# Altium PCB Incubator_HUZZAH32.PcbDoc
Units mil, origin at the board's own origin, x right, y up, seen from the top; angles counter-clockwise.
Board outline 5511.81 x 1106.3 mil, 2 copper layers (Top Layer, Bottom Layer); 32 components, 26 nets, 138 pads, 175 vias.
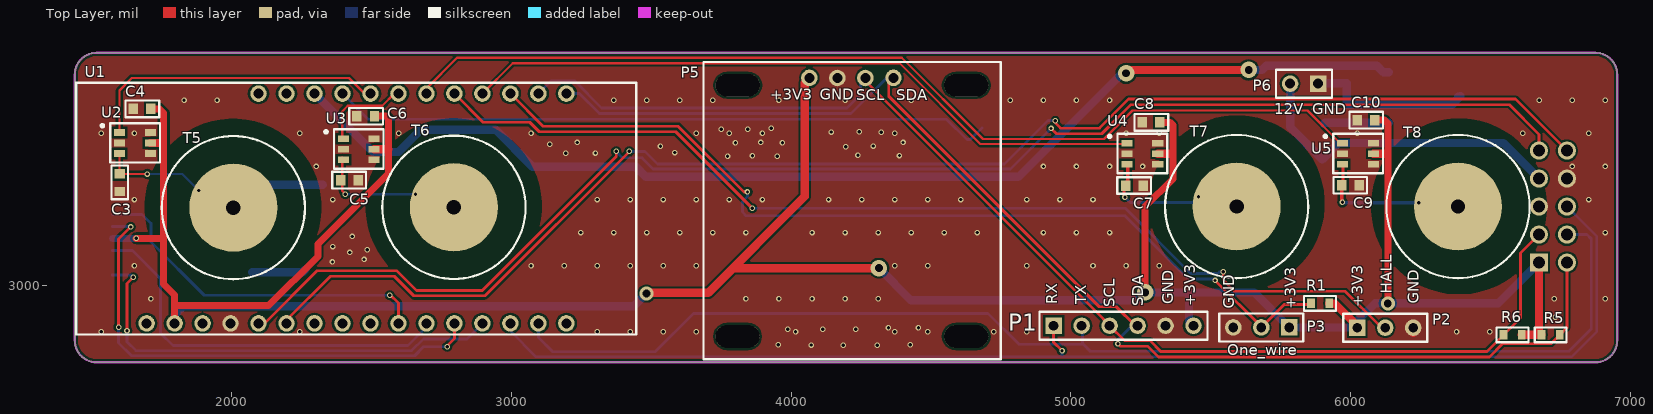
[diagram p0: Top Layer view]
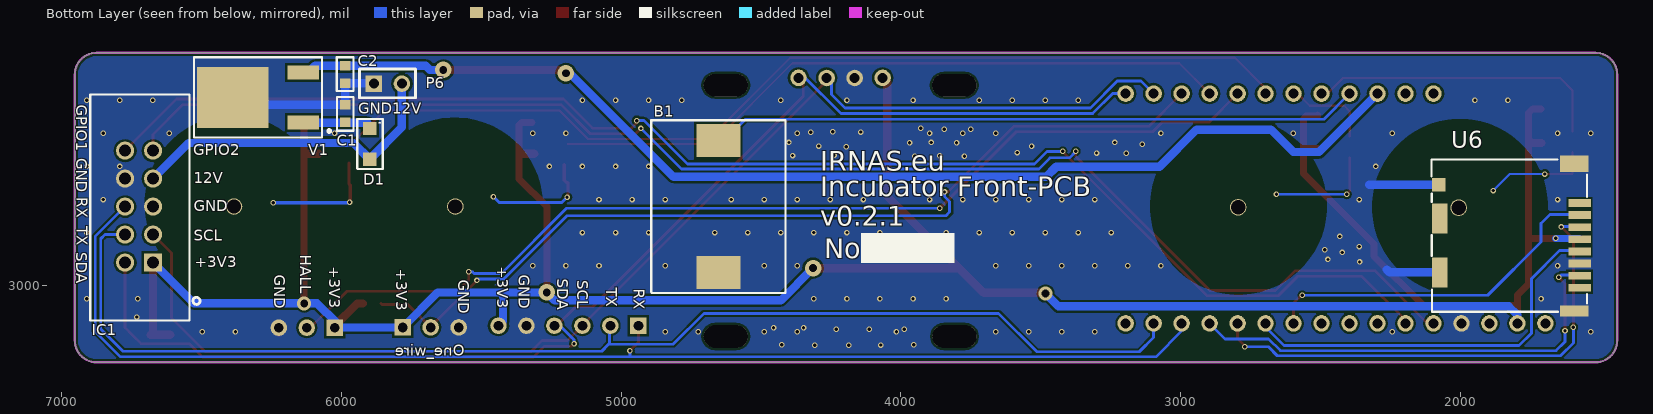
[diagram p1: Bottom Layer view, seen from below]

## Layer stack, top to bottom
Top Solder: solder mask 0.4, Solder Resist, Dk 3.5
Top Layer: signal copper 1.4
Dielectric 1: dielectric 12.6, FR-4, Dk 4.8
Bottom Layer: signal copper 1.4
Bottom Solder: solder mask 0.4, Solder Resist, Dk 3.5

## Board outline
1518.99,2725.25 cw(c1518.99,2803.99) 1440.25,2803.99 1440.25,3752.81 cw(c1518.99,3752.81) 1518.99,3831.55 6873.32,3831.55 cw(c6873.32,3752.81) 6952.06,3752.81 6952.06,2803.99 cw(c6873.32,2803.99) 6873.32,2725.25

## Design rules (kind name [scope] priority, off if disabled: settings)
Clearance [All] p1: gap=8 ignorepadtopadclearanceinfootprint=FALSE except(0: Arc-Hole Track-Hole SMDPad-Hole THPad-Hole Via-Hole Fill-Hole Poly-Hole Region-Hole Text-Hole)
HoleSize [All] p1: absolutevalues=TRUE maxlimit=196.85 minlimit=1 maxpercent=80.000 minpercent=20.000
MinimumAnnularRing [All] p1: minimumring=1.97
MinimumSolderMaskSliver [All] p1: minsoldermaskwidth=0.04
PlaneClearance [InNet('NetR1_1')] p1: clearance=30
PlaneConnect [All] p1: planeconnectstyle=Direct reliefexpansion=20 reliefentries=4 reliefconductorwidth=10 reliefairgap=10
PolygonConnect [All] p1: connectstyle=Direct reliefconductorwidth=10 reliefentries=4 polygonreliefangle="90 Angle" airgapwidth=10
RoutingVias [All] p1: holewidth=11.81 width=19.68 viastyle="Through Hole" minholewidth=11.81 minwidth=19.68 maxholewidth=11.81 maxwidth=19.68
SilkToSilkClearance [All] p1: silktosilkclearance=3.94
SilkToSolderMaskClearance [IsPad] p1: minsilkscreentomaskgap=3.94 clearancetoexposedcopper=TRUE
SolderMaskExpansion [All] p1: expansion=4
Width Width_2 [All] p1: maxlimit=30 minlimit=7 preferedwidth=10
Width Width_1 [InNet('+3V3')] p2: maxlimit=30 minlimit=10 preferedwidth=30
Width [InNetClass('Buttons')] p3: maxlimit=30 minlimit=7 preferedwidth=10
24 further rules are at their usual default settings.

## Components (designator, comment, footprint, x,y, rotation, side; value= is the part's Value field where it differs from the comment)
B1 "Buzzer" BUZZER 4412,3526 r270 bottom
C1 "0.33uF" CAP0603 5985,3614 r270 bottom
C2 "0.1uF" CAP0603 5986,3754 r90 bottom
C3 "10pF cap" CAP0603 1601,3367 r90 top
C4 "150nF cap" CAP0603 1681,3631 r0 top
C5 "10pF cap" CAP0603 2422,3376 r180 top
C6 "150nF cap" CAP0603 2480,3605 r0 top
C7 "10pF cap" CAP0603 5227,3357 r180 top
C8 "150nF cap" CAP0603 5286,3583 r0 top
C9 "10pF cap" CAP0603 5999,3358 r180 top
C10 "150nF cap" CAP0603 6054,3591 r0 top
D1 "Diode" SODFL350X110-2N 5898,3506 r270 bottom
IC1 "IDC10" IDC10 6726,3291 r90 bottom
P1 "Header 6" HDR1X6 4938,2856 r0 top
P2 "HALL" HDR1X3 6023,2849 r0 top
P3 "One_wire" HDR1X3 5780,2850 r180 top
P5 "LCD_display" LCD_DISPLAY 3687,3798 r0 top
P6 "Power" HDR1X2 5883,3721 r180 top
R1 "4K7" RES0603 5832.89,2909.42 r0 top
R5 "4K7" RES0603 6657,2797 r0 top
R6 "4K7" RES0603 6635,2850 r180 top
T5 "Touch button" Touch_Button 2007,3278 r0 top
T6 "Touch button" Touch_Button 2795.1,3279.32 r0 top
T7 "Touch button" Touch_Button 5592,3282 r0 top
T8 "Touch button" Touch_Button 6383,3282 r0 top
U1 "ESP32" ESP32 1447,2825 r90 top
U2 "Touch sensor" TTP223 1656,3509 r0 top
U3 "Touch sensor" TTP223 2455,3487 r0 top
U4 "Touch sensor" TTP223 5255,3471 r0 top
U5 "Touch sensor" TTP223 6026,3471 r0 top
U6 "micro_SD" MICRO_SD 1767,3593 r90 bottom
V1 "Voltage regulator" DPAK248P950X240-3N 6387,3672 r0 bottom

## Footprints (in the part's own frame and the unit in brackets; to place one, negate y for a bottom-side part, rotate by r counter-clockwise, add the part's x,y. Pads: shape width x height; smd on the part's side, far side on the other; paste and mask are expansions set on the pad)
BUZZER [mm]
  rect 3x4 smd: 1(0.2,-6.1) 2(12.2,-6.1)
  silkscreen extent -1.64,-12.19 14.05,-0.01, body extent -0.33,-12.22 12.73,-0.05, height 3
CAP0603 [mm] "Chip Capacitor, 2-Leads, Body 1.60x0.80mm, IPC Medium Density"
  rect 0.85x0.95 smd: 1(-0.8,0) 2(0.8,0)
  silkscreen extent -1.5,-0.76 1.56,0.75, body extent -0.8,-0.4 0.8,0.4, height 0.6
DPAK248P950X240-3N [mm] "D-PAK, 3-Pads, Body 6.25x6.76mm (max), IPC Medium Density"
  rect 2.85x1.25 smd: 1(-6.39,2.29) 3(-6.39,-2.27)
  rect 6.5x5.55 smd: 2(0,0)
  silkscreen extent -8.88,-3.65 3.54,3.64, body extent -4.4,-3.4 1.9,3.4, height 2.4
ESP32 [mm]
  round 1.5 hole 0.9: 1(1,-6.35) 2(1,-8.89) 3(1,-11.43) 4(1,-13.97) 5(1,-16.51) 6(1,-19.05) 7(1.01,-21.59) 8(1,-24.13) 9(1,-26.67) 10(1,-29.21) 11(1,-31.75) 12(1,-34.29) 13(1,-36.83) 14(1,-39.37) 15(1,-41.91) 16(1,-44.45) 17(21.86,-44.45) 18(21.86,-41.91) 19(21.86,-39.37) 20(21.86,-36.83) 21(21.86,-34.29) 22(21.86,-31.75) 23(21.86,-29.21) 24(21.86,-26.67) 25(21.86,-24.13) 26(21.86,-21.59) 27(21.86,-19.05) 28(21.86,-16.51)
  silkscreen extent 0,-50.8 22.85,0.04
HDR1X2 [mm] "Connector; Header; 2 Position"
  rect 1.5x1.5 hole 0.9: 1(0,0)
  round 1.5 hole 0.9: 2(2.54,0)
  silkscreen extent -1.27,-1.27 3.81,1.27
HDR1X3 [mm] "Connector; Header; 3 Position"
  rect 1.5x1.5 hole 0.9: 1(0,0)
  round 1.5 hole 0.9: 2(2.54,0) 3(5.08,0)
  silkscreen extent -1.27,-1.27 6.35,1.27
HDR1X6 [mm] "Connector; Header; 6 Position"
  rect 1.5x1.5 hole 0.9: 1(0,0)
  round 1.5 hole 0.9: 2(2.54,0) 3(5.08,0) 4(7.62,0) 5(10.16,0) 6(12.7,0)
  silkscreen extent -1.27,-1.27 13.97,1.27
IDC10 [mm]
  rect 1.65x1.65 / inner round 1.65 / far side rect 1.65x1.65 hole 1.1: 1(-5.313,-1.367)
  round 1.65 hole 1.1: 2(-5.313,1.173) 3(-2.773,-1.367) 4(-2.773,1.173) 5(-0.233,-1.367) 6(-0.233,1.173) 7(2.307,-1.367) 8(2.307,1.173) 9(4.847,-1.367) 10(4.847,1.173)
  silkscreen extent -10.56,-5.63 9.95,4.33, body extent -10.45,-4.51 9.91,4.66, height 9.43
LCD_DISPLAY [mm]
  round 1.5 hole 0.9: 1(9.61,-1.43)
  round 1.501 hole 0.9: 2(12.15,-1.44) 3(14.69,-1.44) 4(17.24,-1.43)
  oval 4x2 hole 2.032 slot 3.988 at 0 deg unplated: ""(3.09,-24.9) ""(3.1,-2.1) ""(23.85,-24.9) ""(23.85,-2.1)
  silkscreen extent 0.01,-26.96 26.97,0, body extent 0.14,-26.95 26.84,0.91, height 5.47
MICRO_SD [mm]
  rect 0.7x2 smd: 1(-7.577,-4.893) 2(-8.677,-4.893) 3(-9.777,-4.893) 4(-10.877,-4.893) 5(-11.977,-4.893) 6(-13.077,-4.893) 7(-14.177,-4.893) 8(-15.277,-4.893)
  rect 1x2.6 smd: 9(-17.377,-4.393)
  rect 1.5x2.6 smd: 10(-4.027,-4.393)
  rect 1.2x1.2 smd: 11(-5.927,7.907)
  rect 2.7x1.4 smd: 12(-8.977,7.807) 13(-13.877,7.807)
  silkscreen extent -17.45,-5.54 -3.62,8.55, body extent -17.45,-6.93 -3.65,8.45, height 1.98
RES0603 [mm] "Chip Resistor, 2-Leads, Body 1.60x0.80mm, IPC Medium Density"
  rect 0.7x0.85 smd: 1(0.625,0.675) 2(2.275,0.675)
  silkscreen extent 0,0 2.9,1.35, body extent 0.65,0.28 2.25,1.07, height 0.6
SODFL350X110-2N [mm] "SODFL, 2-Leads, Body 1.90x3.50mm, IPC Medium Density"
  rect 1.2x1.2 smd: 1(-1.4,0) 2(1.4,0)
  silkscreen extent -2.26,-1.14 2.27,1.19, body extent -1.4,-0.95 1.4,0.95, height 1.1
Touch_Button [mm]
  round 8 smd: 1(0,0)
  round 1.5 hole 1.3: 1(0,0)
  silkscreen extent -6.5,-6.5 6.5,6.5
TTP223 [mm] "TSOP, 6-Leads, Body 2.90x1.70mm, Pitch 0.95mm, IPC Medium Density"
  rect 1x0.6 smd: 1(-1.4,0.95) 2(-1.4,0) 3(-1.4,-0.95) 4(1.4,-0.95) 5(1.4,0) 6(1.4,0.95)
  silkscreen extent -3.09,-1.78 2.26,1.8, body extent -0.9,-1.55 0.9,1.55, height 1.26

## Part data
B1: "MULTICOMP         MCABT-458-RC            SOUNDER, 75DB, 1-25V, SMD", Current Rating=1mA, Manufacturer=Multicomp, Manufacturer Part Number=MCABT-458-RC, Resonant Frequency=4kHz, Supply Voltage Max=25V, Supply Voltage Min=1V, ComponentLink1Description=http://www.farnell.com/datasheets/1860703.pdf, ComponentLink1URL=http://www.farnell.com/datasheets/1860703.pdf, Pricing 1="1=1.84, 3=1.67, 5=1.53, 10=1.44, 20=1.18, 50=1.16, 250=1.13 (EUR)", Product Range=-, Sound Level SPL=75dB, Stock 1=2929, Supplier 1=Farnell, SVHC="No SVHC (15-Jun-2015)", Tones=Single, Transducer Function=Sounder, Transducer Mounting=SMD
C1: "0.33µF ±10% 50V X7R Ceramic Capacitor -55°C ~ 125°C Surface Mount, MLCC 0603 (1608 Metric) 0.063\" L x 0.031\" W (1.60mm x 0.80mm)", Capacitance=0.33µF, Manufacturer=TDK, Manufacturer Part Number=C1608X7R1H334K080AC, Operating Temperature="-55°C ~ 125°C", Package / Case="0603 (1608 Metric)", PCN Part Number="MLCC Part Number Change 30/Nov/2012", Standard Package=1, Supplier Part Number 1=2346907, Temperature Coefficient=X7R, Tolerance=±10%, Voltage - Rated=50V, Applications="General Purpose", Catalog Drawings="C SERIES_0603_0.95", Category=Capacitors, Design Resources="20 W Non-Isolated Buck LED Driver Using PL LNK460KG", EDA / CAD Models="Download from Accelerated Designs", Family="Ceramic Capacitors", Mounting Type="Surface Mount, MLCC", Online Catalog="C Series, General Purpose", Other Names=445-5950-6, Packaging=Digi-Reel®, Pricing 1="10=0.405, 100=0.221, 500=0.152, 1000=0.116 (EUR)", Product Training Modules="C Series General Applications SEAT, CCV, and TVCL Design Tools Guide to Replacing an Electrolytic Capacitor with an MLCC", RoHS Information="RoHS Certificate-MLCC", Series=C, Size / Dimension="0.063\" L x 0.031\" W (1.60mm x 0.80mm)", Stock 1=46003, Supplier 1=Farnell, Thickness (Max)="0.037\" (0.95mm)"
C2: "CAP CER 0.1UF 50V X7R 0603", Capacitance=.1uF, Case Style="Ceramic Chip", Manufacturer=KEMET, Manufacturer Part Number=C0603C104J5RACAUTO, Operating Temp Range="-55C to 125C", Package / Case=0603, Supplier Part Number 1=2478241, Temp Coeff (Dielectric)=X7R, Tolerance (+ or -)=5%, Voltage=50VDC, Construction="SMT Chip", Failure Rate="Not Required", Mounting Style="Surface Mount", Packaging="Tape and Reel", Product Depth (mm)=0.8mm, Product Diameter (mm)="Not Requiredmm", Product Height (mm)=0.8mm, Product Length (mm)=1.6mm, Stock 1=0, Supplier 1=Farnell, Wire Form="Not Required"
C3 C5 C7 C9: library part 10pF, "Cap Ceramic 10pF 50V X7R 10% SMD 0603 125C T/R", Capacitance="10 pF", Case Size/Dimension=0603, Dielectric=X7R, Manufacturer="Kyocera AVX", Manufacturer Part Number=06035C100KAT2A, Rated Voltage="50 V", Supplier Part Number 1=2332633, Tolerance (%)="±10 %", Stock 1=0, Supplier 1=Farnell
C4 C6 C8 C10: library part 150nF, Capacitance=.15uF, Case Style="Ceramic Chip", Manufacturer=KEMET, Manufacturer Part Number=C0603C154K5RACAUTO, Operating Temp Range="-55C to 125C", Package / Case=0603, Supplier Part Number 1=2821222, Temp Coeff (Dielectric)=X7R, Tolerance (+ or -)=10%, Voltage=50VDC, Construction="SMT Chip", Failure Rate="Not Required", Mounting Style="Surface Mount", Packaging="Tape and Reel", Pricing 1="10=0.125, 100=0.0664, 500=0.0489, 1000=0.041 (EUR)", Product Depth (mm)=0.8mm, Product Diameter (mm)="Not Requiredmm", Product Height (mm)=0.8mm, Product Length (mm)=1.6mm, Stock 1=3690, Supplier 1=Farnell, Wire Form="Not Required"
D1: library part "20V,1A, SOD-123", "NXP         PMEG2010ER             Schottky Rectifier, Single, 20 V, 1 A, SOD-123W, 2 Pins, 340 mV", Manufacturer="NXP Semiconductors", Manufacturer Part Number=PMEG2010ER, Maximum Continuous Forward Current=1A, Maximum Operating Temperature="+150 °C", Minimum Operating Temperature="-55 °C", Package Type=SOD-123, Peak Forward Voltage=340mV, Peak Reverse Current=1mA, Peak Reverse Repetitive Voltage=20V, Supplier Part Number 1=1907681, ComponentLink1Description=https://datasheet.ciiva.com/5727/1760771-5727088.pdf, ComponentLink1URL=https://datasheet.ciiva.com/5727/1760771-5727088.pdf, ComponentLink2Description=https://datasheet.ciiva.com/22696/1383341-22696483.pdf, ComponentLink2URL=https://datasheet.ciiva.com/22696/1383341-22696483.pdf, ComponentLink3Description=https://datasheet.ciiva.com/7965/1383341-7965062.pdf, ComponentLink3URL=https://datasheet.ciiva.com/7965/1383341-7965062.pdf, Dimensions="2.8 x 1.9 x 1.1mm", Diode Configuration=Single, Diode Type=Schottky, Height=1.1mm, Length=2.8mm, Mounting Type="Surface Mount", Number of Elements per Chip=1, Pin Count=2, Pricing 1="5=0.314, 25=0.196, 100=0.147, 250=0.141, 500=0.0849, 1000=0.075, 5000=0.0735 (EUR)", Stock 1=5091, Supplier 1=Farnell, Width=1.9mm
IC1: "BOX HEADER 2.54MM MALE STR 10POS", Current Rating="3 A", Flammability Rating="UL 94 V-0", Insulation Resistance="1000 MOhms", Manufacturer="Wurth Electronics", Manufacturer Part Number=61201021621, Operating Temperature Range="- 40 C to + 125 C", Supplier Part Number 1=1642019, Voltage Rating="250 V", Application=Wire-to-Board, Brand="Wurth Electronics", ComponentLink1Description=https://datasheet.ciiva.com/731/6120xx21621-731344.pdf, ComponentLink1URL=https://datasheet.ciiva.com/731/6120xx21621-731344.pdf, ComponentLink2Description=https://datasheet.ciiva.com/15395/6120xx21621-265834-15395106.pdf, ComponentLink2URL=https://datasheet.ciiva.com/15395/6120xx21621-265834-15395106.pdf, ComponentLink3Description=https://datasheet.ciiva.com/7648/76595-7648121.pdf, ComponentLink3URL=https://datasheet.ciiva.com/7648/76595-7648121.pdf, Contact Gender="Pin (Male)", Contact Material="Copper Alloy", Contact Plating=Gold, Housing Material="Polybutylene Terephthalate (PBT)", Mounting Angle=Horizontal, Mounting Style="Through Hole", Number of Positions="10 Position", Number of Rows="2 Row", Packaging=Tray, Pitch="2.54 mm", Product=Headers, Product Category="Headers & Wire Housings", RoHS=True, Series=WR-BHD, Stock 1=0, Supplier 1=Farnell, Termination Style=Solder, Type=Shrouded
P1: "Header, 6-Pin", LatestRevisionDate=17-Jul-2002, LatestRevisionNote="Re-released for DXP Platform.", Publisher="Altium Limited"
P2 P3: library part "Header 3", "Header, 3-Pin", LatestRevisionDate=17-Jul-2002, LatestRevisionNote="Re-released for DXP Platform.", Publisher="Altium Limited"
P5: library part "Header 4", "Header, 4-Pin", LatestRevisionDate=17-Jul-2002, LatestRevisionNote="Re-released for DXP Platform.", Publisher="Altium Limited"
P6: library part "Header 2", "Header, 2-Pin", LatestRevisionDate=17-Jul-2002, LatestRevisionNote="Re-released for DXP Platform.", Publisher="Altium Limited"
R1 R5 R6: "Res Thick Film 0603 4.7K Ohm 1% 0.1W(1/10W) ±100ppm/C Molded SMD Automotive T/R", Case Code - in=0603, Case Code - mm=1608, Manufacturer=Panasonic, Manufacturer Part Number=ERJ-3EKF4701V, Operating Temperature Range="- 55 C to + 155 C", Package / Case="0603 (1608 metric)", Power Rating="100 mW", Resistance="4.7 kOhms", Supplier Part Number 1=2303181, Temperature Coefficient="100 PPM / C", Tolerance="1 %", Voltage Rating="75 V", Brand=Panasonic, Factory Pack Quantity=5000, Height="0.45 mm", Length="1.6 mm", Packaging=Reel, Pricing 1="10=0.0347, 100=0.0206, 500=0.0159, 1000=0.0142 (GBP)", Product="Thick Film Resistors SMD", Product Category="Thick Film Resistors", Qualification=AEC-Q200, RoHS=True, Series=ERJ, Stock 1=3193, Supplier 1=Farnell, Termination Style=SMD/SMT, Type="Precision Thick Film Resistors SMD", Unit Weight="0.000071 oz", Width="0.8 mm"
U1: library part 3405, "Dip connectro for MCU", Manufacturer="Adafruit Industries", Supplier Part Number 1=1528-2181-ND, ComponentLink1Description=https://espressif.com/sites/default/files/documentation/esp32_datasheet_en.pdf, ComponentLink1URL=https://espressif.com/sites/default/files/documentation/esp32_datasheet_en.pdf, Manufacturer Part Number=3405, Pricing 1="1=19.95 (USD)", Stock 1=276, Supplier 1=Digi-Key
U2 U3 U4 U5: library part Touch_Sensor
U6: Manufacturer=Hirose, Manufacturer Part Number=DM3CS-SF, Standard Package=1, Supplier Part Number 1=1764376, Card Type="Secure Digital - microSD™", Category="Connectors, Interconnects", ComponentLink1Description=https://datasheet.ciiva.com/683/e60900232-683360.pdf, ComponentLink1URL=https://datasheet.ciiva.com/683/e60900232-683360.pdf, ComponentLink2Description=https://datasheet.ciiva.com/683/e60900232-683361.pdf, ComponentLink2URL=https://datasheet.ciiva.com/683/e60900232-683361.pdf, ComponentLink3Description=https://datasheet.ciiva.com/7651/1465328-7651895.pdf, ComponentLink3URL=https://datasheet.ciiva.com/7651/1465328-7651895.pdf, ComponentLink4Description=https://datasheet.ciiva.com/3122/e60900232-3122536.pdf, ComponentLink4URL=https://datasheet.ciiva.com/3122/e60900232-3122536.pdf, ComponentLink5Description=https://datasheet.ciiva.com/4581/e60900232-38395-4581034.pdf, ComponentLink5URL=https://datasheet.ciiva.com/4581/e60900232-38395-4581034.pdf, ComponentLink6Description=https://datasheet.ciiva.com/16434/e60900232-16434058.pdf, ComponentLink6URL=https://datasheet.ciiva.com/16434/e60900232-16434058.pdf, ComponentLink7Description=https://datasheet.ciiva.com/16655/e60900232-16655644.pdf, ComponentLink7URL=https://datasheet.ciiva.com/16655/e60900232-16655644.pdf, ComponentLink8Description=https://datasheet.ciiva.com/683/e60900232-683359.pdf, ComponentLink8URL=https://datasheet.ciiva.com/683/e60900232-683359.pdf, Connector Type="Connector and Ejector", Contact Finish=Gold, Contact Finish Thickness=-, Ejector Side=-, Family="Memory Connectors - PC Card Sockets", Featured Product="DM3CS Connector", Features=Switch, Height Above Board="0.072\" (1.83mm)", HTML Datasheet="DM3 Series microSD.html", Insertion, Removal Method="Hinged Lid", Mounting Feature="Normal, Standard - Top", Mounting Type="Surface Mount, Right Angle", Number of Positions="10 (8 + 2)", Online Catalog="DM3 Series", Other Names=HR1972DKR, Packaging=Digi-Reel®, Pricing 1="1=0.967, 50=0.925, 100=0.883, 250=0.798, 500=0.735, 1000=0.494 (GBP)", Product Training Modules="DM3 Series microSD Card Sockets", Series=DM3, Stock 1=15420, Supplier 1=Farnell
V1: library part 5-20V, "FAIRCHILD SEMICONDUCTOR         KA7805ERTF             Linear Voltage Regulator, 7805, Fixed, 10V To 35V In, 5V And 1A Out, TO-252-3", Dropout Voltage Measurement Current="1 A", Manufacturer="ON Semiconductor / Fairchild", Manufacturer Part Number=KA7805ERTF, Maximum Input Voltage="25 V", Maximum Operating Temperature="+125 °C", Maximum Output Current=1A, Minimum Input Voltage="7 V", Minimum Operating Temperature="0 °C", Output Voltage="5 V", Package Type=DPAK, Quiescent Current=8mA, Supplier Part Number 1=2102585, Typical Dropout Voltage @ Current="2 V @ 1 A", Dimensions="6.73 x 6.22 x 2.38mm", Height=2.38mm, Length=6.73mm, Line Regulation="100 mV", Load Regulation="100 mV", Mounting Type="Surface Mount", Number of Outputs=1, Output Type=Fixed, Pin Count=3, Polarity=Positive, Pricing 1="1=0.793, 50=0.693, 100=0.447 (GBP)", Regulator Function=Linear, Series=KA78xx, Stock 1=0, Supplier 1=Farnell, Width=6.22mm

## Via types
v1: diameter 19.68, hole 11.81, Top Layer to Bottom Layer, tented both sides, 169 vias
v2: diameter 59.06, hole 27.56, Top Layer to Bottom Layer, tented both sides, 4 vias
v3: diameter 50, hole 28, Top Layer to Bottom Layer, tented both sides, 2 vias

## Nets (pads, with @x,y where several pads share a name; then routed paths per layer and width w, separated by ;. In a path a pad name is that pad's centre, name@x,y a point inside that pad or via, vN(x,y) a via of type N, cw(c..) or ccw(c..) an arc to the next point about the centre after c; other vN are vias at no path point)
12V: D1.2 IC1.7 P6.2 | length 1168.7
  Bottom Layer w30: P6.2 5783,3565.88 D1.2 5956.12,3509 6545.01,3509 IC1.7
+3V3: C4.2 C6.2 C8.2 C10.2 IC1.1 P1.6 P2.1 P3.1 P5.1 R1.2 R5.1 R6.1 U1.2 U2.5 U3.5 U4.5 U5.5 U6.4 | length 10353.8
  Top Layer w25: v1(1659.99,3168.53) 1750.99,3168.53 ; C4.2 1742.61,3631 1758,3615.61 1758,3005 1797,2966 1797,2928 ; U1.2 1797,2928 ; C6.2@2510.5,3605 C6.2@2510.5,3609 ; C6.2 2552,3605 2562,3595 2562,3487 ; 2561,3487 2561,3400 2309,3148 2309,3104 2133,2928 1797,2928 ; v2(5265,2975) 5265,3282 5364,3381 5364,3573 5354,3583 C8.2 ; C10.2 6120,3591 6132,3579 v3(6132,2936)
  Top Layer w29.53: U2.5 1746,3509 1747,3510 ; U3.5 2561,3487 ; U4.5 5361,3471 ; R1.2@5922.45,2935.57 5942.57,2935.57 6023,2855.14 P2.1 ; U5.5 6127,3471 6129,3473 ; R6.1 6681.46,2823.43 R5.1 6672.18,2833 IC1.1
  Top Layer w30: v3(3483,2971) 3486,2974 3704.63,2974 4048.35,3317.72 4048.35,3724.7 P5.1 ; 3798.5,3063.5 3800,3062 v2(4314,3062)
  Bottom Layer w25: U6.4@1574.36,3167.77 1660.23,3167.77 v1(1659.99,3168.53)
  Bottom Layer w29.53: 1797,2894 1828,2925 ; v2(4314,3062) 4429,2947 5237,2947 v2(5265,2975) 5422,2975 ; P1.6 5422,2872 5422,2975 ; IC1.1 6526.35,2936 v3(6132,2936) 6086,2936 6015,2865 6015,2850 P3.1 5655,2975 5422,2975
  Bottom Layer w30: 1828,2925 3437,2925 v3(3483,2971)
+5V: C2.2 U1.26 V1.3 | length 4214.2
  Top Layer w30: v2(5197,3758) 5197,3767 5194,3770 v2(5635,3770)
  Bottom Layer w30: U1.26 2505.94,3476.69 2597.69,3476.69 2678,3557 2943,3557 3075.77,3424.23 3444.79,3424.23 3481.02,3388 4812,3388 5182,3758 v2(5197,3758) ; v2(5635,3770) 5683,3770 5698.5,3785.5 C2.2 6092.5,3785.5 6116.63,3761.37 V1.3
Button1: U1.24 U2.1 | length 1084.8
  Top Layer w8: U2.1@1599.88,3550.4 1599.88,3696.88 1644,3741 2420,3741 2475.37,3685.63 U1.24
Button2: U1.23 U3.1 | length 317
  Top Layer w8: U3.1@2395.88,3532.4 2395.88,3621.88 2416.1,3642.1 2538.91,3642.1 2582.44,3685.63 U1.23
Button3: U1.20 U4.1 | length 2458.3
  Top Layer w8: U1.20 3005.62,3794.25 4387.75,3794.25 4677,3505 U4.1@5190.48,3505
Button4: U1.22 U5.1 | length 3548
  Top Layer w8: U1.22 2697,3704 2806.25,3813.25 4395.75,3813.25 4686,3523 5118,3523 5220,3625 5845,3625 U5.1@5958.6,3511.4
  Top Layer w12: U5.1@5958.6,3511.4 U5.1@5971.88,3511.4
CD/DAT3: U1.10 U6.2 | length 1269.7
  Top Layer w10: v1(2566,2965) 2566,2968 2597,2937 U1.10
  Bottom Layer w10: U6.2@1574.75,3254 1681,3254 1713,3222 1713,3155 1903,2965 v1(2566,2965)
CMD: U1.12 U6.3 | length 1798.8
  Top Layer w10: v1(1597,2851) 1597,3166 v1(1640,3209) ; v1(2771,2781) 2771,2784 2797,2810 U1.12
  Bottom Layer w10: U6.3@1574.36,3211.08 1637.92,3211.08 v1(1640,3209) ; v1(1597,2851) 1597,2795 1643,2749 2655,2749 2687,2781 v1(2771,2781)
DAT0: U1.13 U6.7 | length 1641
  Top Layer w10: v1(1627,2838) 1627,3007 v1(1649,3029)
  Bottom Layer w10: U6.7@1574.36,3037.85 1640.15,3037.85 v1(1649,3029) ; v1(1627,2838) 1627,2799 1659,2767 2644,2767 2686,2809 2841.63,2809 U1.13
GND: B1.2 C1.1 C2.1 C3.1 C4.1 C5.1 C6.1 C7.1 C8.1 C9.1 C10.1 IC1.5 IC1.8 P1.5 P2.3 P3.3 P5.2 P6.1 U1.4 U2.2 U2.4 U2.6 U3.2 U3.4 U3.6 U4.2 U4.4 U4.6 U5.2 U5.4 U5.6 U6.6 U6.9 U6.10 U6.11 U6.13 V1.2 | length 1068.4
  Top Layer w30: P2.3@6223,2831.19 P2.3
  Bottom Layer w30: U6.13 2253.66,3046.66 2264,3057 ; U6.11 2326.65,3359.65 ; P6.1@5884,3710 5896.5,3722.5 C2.1 5986,3648.5 C1.1@5988,3646.5 ; C1.1 6360.5,3645.5 V1.2 ; V1.2@6384,3675 V1.2 ; V1.2@6392,3677 V1.2
  other v1: 4186,2786 4308,2786 4072,2787 3954,2788 4426,2788 1535.43,2834.64 2244.09,2834.64 3307.09,2834.64 3425.2,2834.64 3543.31,2834.64 3661.42,2834.64 4015.75,2834.64 4370.08,2834.64 4488.19,2834.64 4724.41,2834.64 4842.52,2834.64 6377.95,2834.64 6496.06,2834.64 3988,2843 4231,2843 4113,2844 4348,2849 4455,2849 6730,2887 6727,2952 1712.6,2952.76 3838.58,2952.76 3956.69,2952.76 4074.8,2952.76 4192.91,2952.76 4311.02,2952.76 6909.45,2952.76 1653.54,3070.87 3070.87,3070.87 3188.98,3070.87 3307.09,3070.87 3425.2,3070.87 3543.31,3070.87 3661.42,3070.87 4370.08,3070.87 4488.19,3070.87 4842.52,3070.87 5078.74,3070.87 5196.85,3070.87 5314.96,3070.87 2361,3084 2474,3093 2423,3118 2485,3128 2362,3139 2432,3175 3248.03,3188.98 3366.14,3188.98 3484.25,3188.98 3602.36,3188.98 3720.47,3188.98 3838.58,3188.98 4074.8,3188.98 4192.91,3188.98 4311.02,3188.98 4429.13,3188.98 4547.24,3188.98 4665.35,3188.98 4901.57,3188.98 5019.68,3188.98 5137.79,3188.98 6909.45,3188.98 1653.54,3307.09 2362.2,3307.09 3307.09,3307.09 3425.2,3307.09 3543.31,3307.09 3661.42,3307.09 3779.53,3307.09 3897.64,3307.09 4133.86,3307.09 4251.97,3307.09 4370.08,3307.09 4488.19,3307.09 4606.3,3307.09 4842.52,3307.09 4960.63,3307.09 5078.74,3307.09 6850.39,3307.09 2303.15,3425.2 4901.57,3425.2 5019.68,3425.2 5137.79,3425.2 5255.9,3425.2 6791.34,3425.2 6909.45,3425.2 3773,3462 3951,3462 3862,3463 4387,3464 4239,3465 3195,3472 3301,3473 3584,3475 4195,3496 3533,3497 4294,3498 3138,3504 3801,3510 3969,3510 3236,3511 3892,3511 4400,3511 1535.43,3543.31 1653.54,3543.31 2244.09,3543.31 2598.42,3543.31 3070.87,3543.31 3661.42,3543.31 3779.53,3543.31 3897.64,3543.31 4370.08,3543.31 5196.85,3543.31 5314.96,3543.31 6023.62,3543.31 6614.17,3543.31 6850.39,3543.31 4322,3547 4143,3548 4244,3549 3750,3558 3845,3558 3929,3562 1830.71,3661.42 1948.82,3661.42 3366.14,3661.42 3484.25,3661.42 3602.36,3661.42 3720.47,3661.42 3956.69,3661.42 4192.91,3661.42 4429.13,3661.42 4783.46,3661.42 4901.57,3661.42 5019.68,3661.42 5137.79,3661.42 6673.23,3661.42 6791.34,3661.42 6909.45,3661.42
GPIO1: IC1.10 U1.6 | length 5117.5
  Top Layer w10: U1.6 2197,2876.33 2353.51,3032.84 2582,3032.84 2651.84,2963 2906,2963 v1(3422.07,3479.07) ; v1(4944,3589) 4942.45,3589 4939.29,3585.84 4963.13,3562 5101.85,3562 5205.85,3666 6588.01,3666 IC1.10
  Bottom Layer w10: v1(3422.07,3479.07) 3477.93,3479.07 3523,3434 4763,3434 4918,3589 v1(4944,3589)
GPIO2: IC1.9 U1.5 | length 5139.2
  Top Layer w10: U1.5 2118.37,2864.37 2306.84,3052.84 2590,3052.84 2661.04,2981.81 2896.52,2981.81 3375,3460.28 v1(3375,3479) ; v1(4929,3561) 4948,3542 5110.13,3542 5214.13,3646 6566,3646 6672.18,3539.82 IC1.9
  Bottom Layer w10: v1(3375,3479) 3375,3478 3397,3456 3467,3456 3507,3416 4784,3416 v1(4929,3561)
HALL: P2.2 U1.21 | length 3689.1
  Top Layer w10: U1.21 2899.63,3583 3066,3583 3100,3549 3588,3549 v1(3861,3276) ; v1(5544,3049) 5544,3020 5585,2979 5980,2979 6099,2860 P2.2@6122,2860
  Bottom Layer w10: v1(3861,3276) 5194.28,3276 5427.44,3042.84 5525.29,3042.84 5531.45,3049 v1(5544,3049)
NetB1_1: B1.1 U1.25 | length 2370.8
  Bottom Layer w10: U1.25 2488.63,3594 4555,3594 4628,3521 4640.03,3521 B1.1@4682.16,3563.13
NetC1_2: C1.2 D1.1 V1.1 | length 232.9
  Bottom Layer w30: D1.1@5904.12,3578 5907.96,3581.84 V1.1
NetC3_2: C3.2 T5.1 U2.3 | length 379.4
  Top Layer w8: C3.2@1599.88,3402.87 U2.3@1599.88,3475.6 ; C3.2 1698.5,3398.5 v1(1699,3398)
  Bottom Layer w8: v1(1699,3398) 1824,3398 v1(1883,3339)
NetC5_2: C5.2 T6.1 U3.3 | length 387.2
  Top Layer w8: U3.3@2395.88,3457.6 2395.88,3337.12 v1(2407,3326)
  Bottom Layer w8: v1(2407,3326) v1(2658,3326)
NetC7_2: C7.2 T7.1 U4.3 | length 399.3
  Top Layer w10: C7.2@5189.5,3368 5189.5,3318.5 v1(5193,3315)
  Top Layer w12: C7.2@5196.5,3369 5202.88,3375.38 U4.3@5202.88,3431.6
  Bottom Layer w10: v1(5193,3315) 5212,3296 5435,3296 v1(5456,3317)
NetC9_2: C9.2 T8.1 U5.3 | length 415.9
  Top Layer w12: v1(5970,3297) 5967.5,3299.5 C9.2 5971.88,3362.38 U5.3@5971.88,3436.6
  Bottom Layer w12: v1(5970,3297) 5971,3296 v1(6243,3296)
One_wire: P3.2 R1.1 U1.19 | length 3311.6
  Top Layer w10: U1.19 3113.63,3569 3596.28,3569 3831.28,3334 v1(3844,3334) ; v1(5515,3018) 5680,2853 P3.2 5762,2932 5853.49,2932 R1.1
  Bottom Layer w10: v1(3844,3334) 3844,3318 3826,3300 3826,3262 3839,3249 5193,3249 5419.16,3022.84 5510.16,3022.84 v1(5515,3018)
RX: IC1.6 P1.1 U1.14 | length 4611.2
  Top Layer w10: P1.1 4938,2797 v1(4968,2767)
  Bottom Layer w10: U1.14@3009.5,2864.37 U1.14 2997,2837 3089,2745 4968,2745 ; v1(4968,2767) 4968,2745 ; IC1.6 6879,3175.01 6879,2836 6788,2745 4968,2745
SCK: U1.11 U6.5 | length 1418.2
  Bottom Layer w10: U6.5@1574.36,3124.46 1646.54,3124.46 1747,3024 1747,2829 1791,2785 2631,2785 2697,2851 U1.11
SCL: IC1.3 P1.3 P5.3 R6.2 U1.18 | length 4437.1
  Top Layer w10: P5.3@4248.35,3748.31 5116.13,2880.53 5116.13,2877.87 P1.3 5191,2803 5282,2803 5320.81,2764.19 6486.19,2764.19 R6.2 6606,2883.99 6606,3115.65 IC1.3
  Bottom Layer w10: U1.18 3141.53,3730.16 3226.84,3730.16 3323,3634 4199.54,3634 4248.35,3682.8 P5.3@4248.35,3748.31
SDA: IC1.2 P1.4 P5.4 R5.2 U1.17 | length 4543.5
  Top Layer w10: P5.4@4348.74,3748.7 4348.74,3676.2 5100.94,2924 5162,2924 5230,2856 P1.4 ; v1(5168,2792) 5177,2783 5273.72,2783 5312.53,2744.19 6495.19,2744.19 6543,2792 6714.99,2792 R5.2 6772.18,2849.19 IC1.2
  Bottom Layer w10: U1.17 3243.09,3685.63 3314.72,3614 4214.04,3614 P5.4@4348.74,3748.7 ; v1(5168,2792) 5168,2806 5218,2856 P1.4
TX: IC1.4 P1.2 U1.15 | length 4458.5
  Bottom Layer w10: U1.15 3097,2814.46 3148.46,2763 3514,2763 3651,2900 4704,2900 4814.16,2789.84 5044.16,2789.84 5069,2765 6779.72,2765 6859,2844.28 6859,3166.72 6843.9,3181.83 IC1.4 ; P1.2 5041,2853 5041,2793
pads on no net: P5. U1.1 U1.3 U1.7 U1.8 U1.9 U1.16 U1.27 U1.28 U6.1 U6.8 U6.12

## Polygon pours and split planes (outlines as drawn)
GND on Bottom Layer "Bottom_layer_GND" (solid, remove dead copper, pour order 8): 1518.99,2725.25 cw(c1518.99,2803.99) 1440.25,2803.99 1440.25,3752.81 cw(c1518.99,3752.81) 1518.99,3831.55 6873.32,3831.55 cw(c6873.32,3752.81) 6952.06,3752.81 6952.06,2803.99 cw(c6873.32,2803.99) 6873.32,2725.25
GND on Top Layer "Top Layer-GND" (solid, remove dead copper, pour order 7): 1518.99,2725.25 cw(c1518.99,2803.99) 1440.25,2803.99 1440.25,3752.81 cw(c1518.99,3752.81) 1518.99,3831.55 6873.32,3831.55 cw(c6873.32,3752.81) 6952.06,3752.81 6952.06,2803.99 cw(c6873.32,2803.99) 6873.32,2725.25

## Keep-outs
Keep-Out Layer:
  lines w7.87: 1440.25,2803.99 ccw(c1518.99,2803.99) 1518.99,2725.25 6873.32,2725.25 ccw(c6873.32,2803.99) 6952.06,2803.99 ; 1440.25,2803.99 1440.25,3752.81 ; 1440.25,2803.99 1440.25,2803.99 ; 1440.25,3752.81 cw(c1518.99,3752.81) 1518.99,3831.55 6873.32,3831.55 cw(c6873.32,3752.81) 6952.06,3752.81 ; 1440.25,3752.81 1440.25,3752.81 ; 6952.06,2803.99 6952.06,2803.99 ; 6952.06,2803.99 6952.06,3752.81 ; 6952.06,3752.81 6952.06,3752.81

## Other copper
Top Layer:
  pour cut-out: 5592.77,2977.51 cw(c5592.77,3292.47) 5277.81,3292.47 cw(c5592.77,3292.47) 5592.77,3607.43 cw(c5592.77,3292.47) 5907.73,3292.47 cw(c5592.77,3292.47)
  pour cut-out: 6386.47,2967.81 cw(c6386.47,3282.77) 6071.51,3282.77 cw(c6386.47,3282.77) 6386.47,3597.73 cw(c6386.47,3282.77) 6701.43,3282.77 cw(c6386.47,3282.77)
  pour cut-out: 2793.56,2967.17 cw(c2793.56,3282.13) 2478.6,3282.13 cw(c2793.56,3282.13) 2793.56,3597.09 cw(c2793.56,3282.13) 3108.52,3282.13 cw(c2793.56,3282.13)
  pour cut-out: 2006,2965.04 cw(c2006,3280) 1691.04,3280 cw(c2006,3280) 2006,3594.96 cw(c2006,3280) 2320.96,3280 cw(c2006,3280)
Bottom Layer:
  pour cut-out: 6386.4,2977.61 cw(c6386.4,3292.57) 6071.44,3292.57 cw(c6386.4,3292.57) 6386.4,3607.53 cw(c6386.4,3292.57) 6701.36,3292.57 cw(c6386.4,3292.57)
  pour cut-out: 5594.47,2970.03 cw(c5594.47,3284.99) 5279.51,3284.99 cw(c5594.47,3284.99) 5594.47,3599.95 cw(c5594.47,3284.99) 5909.43,3284.99 cw(c5594.47,3284.99)
  pour cut-out: 2793.99,2967.51 cw(c2793.99,3282.47) 2479.03,3282.47 cw(c2793.99,3282.47) 2793.99,3597.43 cw(c2793.99,3282.47) 3108.95,3282.47 cw(c2793.99,3282.47)
  pour cut-out: 2002.09,2965.49 cw(c2002.09,3280.45) 1687.13,3280.45 cw(c2002.09,3280.45) 2002.09,3595.41 cw(c2002.09,3280.45) 2317.05,3280.45 cw(c2002.09,3280.45)

## Silkscreen, mask and mechanical layers (free items; w line width, h text height)
Top Overlay:
  pour cut-out: 2007,3021.37 cw(c2007,3278) 1750.37,3278 cw(c2007,3278) 2007,3534.63 cw(c2007,3278) 2263.63,3278 cw(c2007,3278)
  text "+3V3" at 3926,3663 h39.37
  text "GND" at 4102,3663 h39.37
  text "SCL" at 4232,3662 h39.37
  text "SDA" at 4376,3662 h39.37
  text "12V" at 5727,3612 h39.37
  text "GND" at 5862,3612 h39.37
  text "HALL" at 6146,2971 h39.37 r90
  text "GND" at 6242,2934 h39.37 r90
  text "TX" at 5054,2933 h39.37 r90
  text "RX" at 4951,2932 h39.37 r90
  text "GND" at 5366,2932 h39.37 r90
  text "SDA" at 5259,2926 h39.37 r90
  text "+3V3" at 5444,2925 h39.37 r90
  text "SCL" at 5156,2923 h39.37 r90
  text "+3V3" at 6042,2922 h39.37 r90
  text "GND" at 5583,2916 h39.37 r90
  text "+3V3" at 5803,2915 h39.37 r90
  text "One_wire" at 5559,2750 h39.37
Bottom Overlay:
  rectangle: 3808.65,3081 4143,3188
  lines w10: 5734,3671 5934,3671 5934,3773 5734,3773 5734,3671
  text "P6" at 5698,3704 h39.37
  text "GPIO1" at 6946,3646 h39.37 r90
  text "12V" at 5817,3613 h39.37
  text "GND" at 5939,3613 h39.37
  text "GPIO2" at 6528,3465 h39.37
  text "GND" at 6946,3454 h39.37 r90
  text "IRNAS.eu" at 4289,3410 h70
  text "12V" at 6527,3365 h39.37
  text "Incubator Front-PCB" at 4289,3319 h70
  text "RX" at 6945,3316 h39.37 r90
  text "GND" at 6526,3266 h39.37
  text "v0.2.1" at 4289,3214 h70
  text "TX" at 6945,3212 h39.37 r90
  text "SCL" at 6526,3159 h39.37
  text "SDA" at 6946,3118 h39.37 r90
  text "HALL" at 6147,3109 h39.37 r90
  text "No" at 4274,3098 h70
  text "+3V3" at 5443,3069 h39.37 r90
  text "+3V3" at 6043,3068 h39.37 r90
  text "+3V3" at 6524,3065 h39.37
  text "+3V3" at 5803,3060 h39.37 r90
  text "GND" at 5365,3038 h39.37 r90
  text "GND" at 6240,3038 h39.37 r90
  text "SDA" at 5228,3024 h39.37 r90
  text "GND" at 5582,3020 h39.37 r90
  text "SCL" at 5156,3018 h39.37 r90
  text "TX" at 5053,2992 h39.37 r90
  text "RX" at 4955,2989 h39.37 r90
  text "One_wire" at 5559,2749 h39.37
Mechanical 1:
  lines w0.5: 1440.25,2803.99 ccw(c1518.99,2803.99) 1518.99,2725.25 6873.32,2725.25 ccw(c6873.32,2803.99) 6952.06,2803.99 6952.06,3752.81 ccw(c6873.32,3752.81) 6873.32,3831.55 1518.99,3831.55 ccw(c1518.99,3752.81) 1440.25,3752.81 1440.25,2803.99
ASM TOP:
  text "ASSEMBLY DRAWING TOP" at 3818,3883 h39.37
ASM BOT:
  text "ASSEMBLY DRAWING BOT" at 4568,3877 h39.37

## Dimensions
1518.99,3831.55 to 1518.99,2725.25 on Mechanical 1
1440.25,3752.81 to 6952.06,3752.81 on Mechanical 1